# EAGLE board exp_3 (EAGLE 7.6.0)

Size 56.82 x 53.33 mm. Coordinates in mm from the lower left corner, seen from the top.
Outline: 0,0 56.82,0 56.82,53.33 0,53.33 0,0
Copper layers (1*16): Top 0.035mm / dielectric 1.5mm / Bottom 0.035mm
Design rules "default": minimum track width 10mil, minimum drill 24mil, track to track 8mil, track to pad 8mil, pad to pad 8mil, via to via 8mil, smd to smd 8mil, copper to edge 40mil, drill to drill 8mil, minimum pad ring 10mil, minimum via ring 8mil, stop-mask expansion 4mil, vias tented up to drill 0mil, thermal gap 10mil

## Footprints (pad centres in the part's own frame; a part is rotated, then mirrored left to right if it is on the bottom)
DC-POWER = drill 0.889 pad 2.54 octagon: + 0,2.54; - 0,-2.54
C5B2.5 = drill 0.813 pad 1.6 octagon: 1 -2.54,0; 2 2.54,0
0207/10 = drill 0.813 octagon: 1 -5.08,0; 2 5.08,0
DIL08 = drill 0.813 pad 1.27: 1 -3.81,-3.81; 2 -1.27,-3.81; 3 1.27,-3.81; 4 3.81,-3.81; 5 3.81,3.81; 6 1.27,3.81; 7 -1.27,3.81; 8 -3.81,3.81

## Placement (x,y rotation side)
BAT1  [DC-POWER]  5,35.48 0 top
C1  0.01uF  [C5B2.5]  5,86.28 0 top  (outside the outline)
CC1  0.1uF  [C5B2.5]  5,73.58 0 top  (outside the outline)
CC7  1nF  [C5B2.5]  5,162.48 0 top  (outside the outline)
CC8  0.47uF  [C5B2.5]  5,149.78 0 top  (outside the outline)
CCs  1uF  [C5B2.5]  5,137.08 0 top  (outside the outline)
CCt  0.01uF  [C5B2.5]  5,111.68 0 top  (outside the outline)
Meter2  [DC-POWER]  5,213.28 0 top  (outside the outline)
RR  1k‎Ω  [0207/10]  5,124.38 0 top  (outside the outline)
RR1  8.7k‎Ω  [0207/10]  5,48.18 0 top
RR2  10k‎Ω  [0207/10]  5,60.88 0 top  (outside the outline)
RR7  10k‎Ω  [0207/10]  5,175.18 0 top  (outside the outline)
RRt  1k‎Ω  [0207/10]  5,98.98 0 top  (outside the outline)
U1  [DIL08]  5,10.08 0 top
U2  [DIL08]  5,22.78 0 top
U3  [DC-POWER]  5,187.88 0 top  (outside the outline)
U4  [DC-POWER]  5,200.58 0 top  (outside the outline)

## Library data of the parts
BAT1 C1 CC1 CC7 CC8 CCs CCt Meter2 RR RR1 RR2 RR7 RRt U1-U4 = AUTODESK_CIRCUITS_BREADBOARD

## Nets
N$1: CC8.2 CCs.2 RR.1 U2.6 U2.7
N$2: BAT1.+ RR1.2 RR.2 RRt.2 U1.4 U1.8 U2.4 U2.8
N$3: RR1.1 RR2.2 U1.7
N$4: BAT1.- CC1.2 CC7.1 CC8.1 CCs.1 Meter2.- RR7.1 U1.1 U2.1 U3.- U4.-
N$5: CC1.1 RR2.1 U1.2 U1.6
N$6: C1.1 U1.5
N$7: C1.2
N$8: CCt.2 RRt.1
N$9: CCt.1 U1.3 U2.2 U3.+
N$10: CC7.2 U2.5
N$11: Meter2.+ RR7.2 U2.3 U4.+

## Tracks (layer width: path | path; a pad name or v marks a point on that pad's centre or on a via)
N$1  (4 unrouted)
N$2  (7 unrouted)
N$3  (2 unrouted)
N$4  (10 unrouted)
N$5  (3 unrouted)
N$6  (1 unrouted)
N$8  (1 unrouted)
N$9  (3 unrouted)
N$10  (1 unrouted)
N$11  (3 unrouted)